# Altium PCB PCB_arduino_uno_cong_v2.PcbDoc
Units mm, origin at the board's own origin, x right, y up, seen from the top; angles counter-clockwise.
Board outline 82.8 x 51.56 mm, 2 copper layers (Top Layer, Bottom Layer); 55 components, 55 nets, 241 pads, 61 vias.
Unrouted connection lines stored in the file: 1.
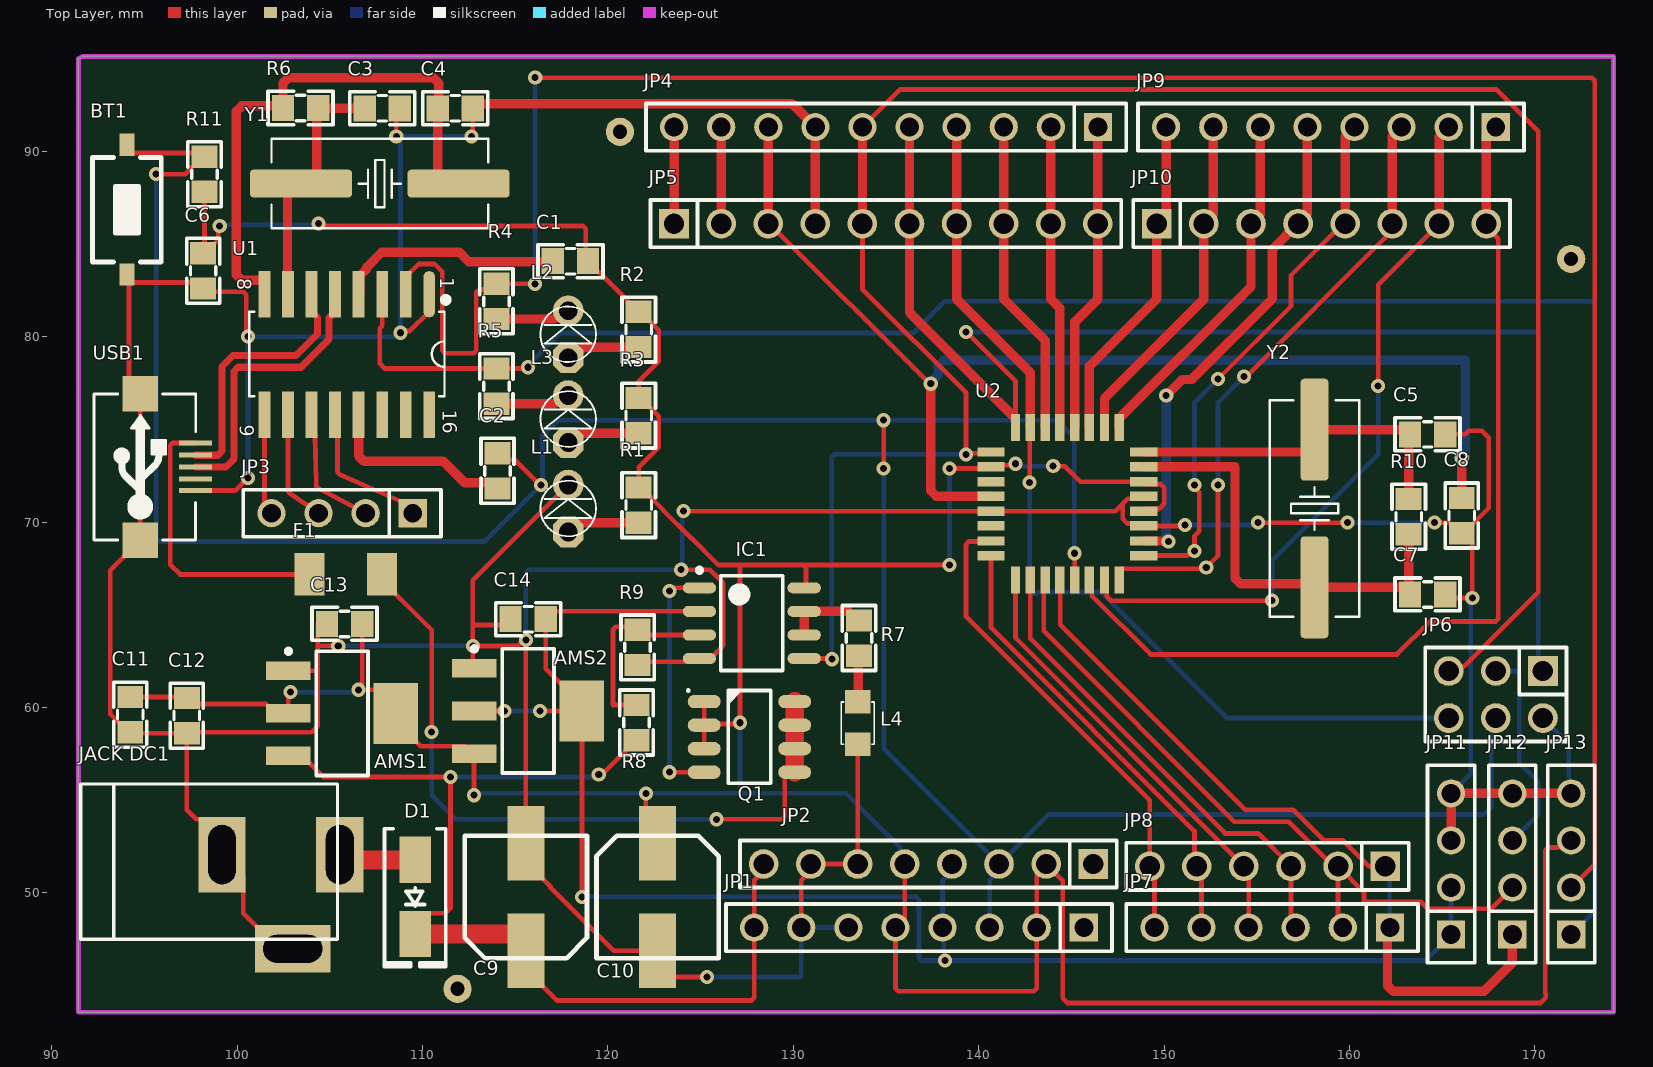
[diagram p0: Top Layer view]
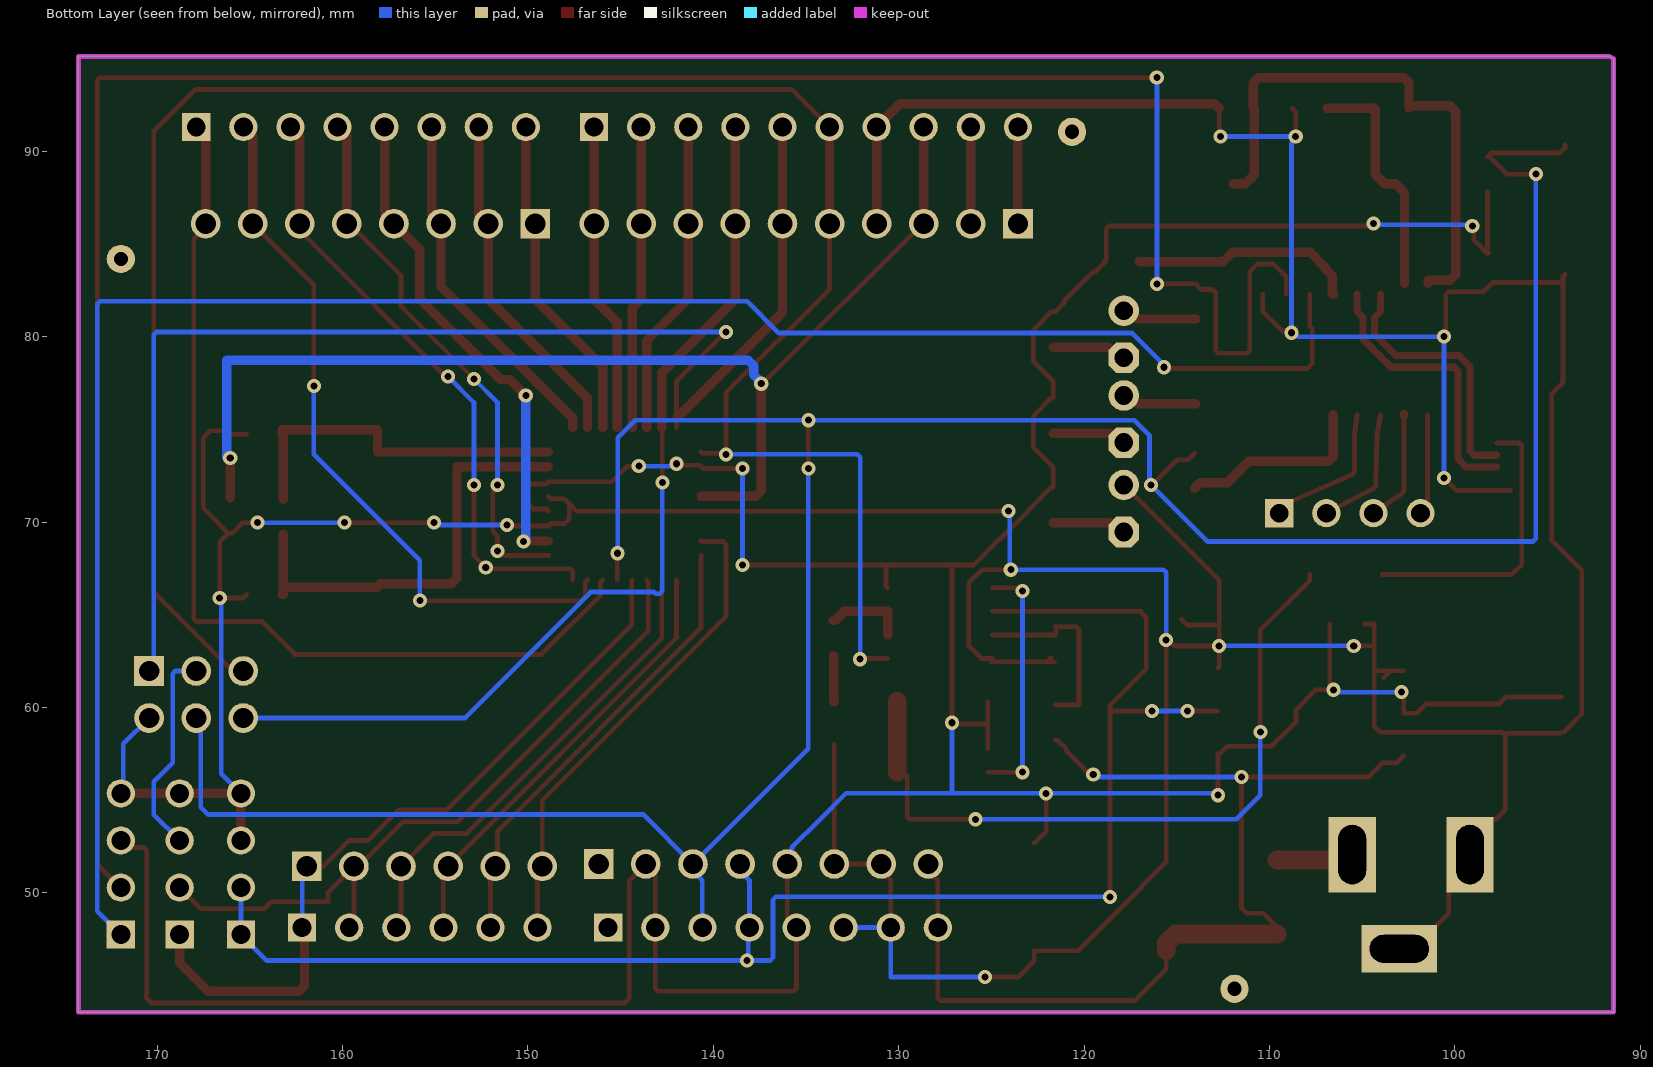
[diagram p1: Bottom Layer view, seen from below]
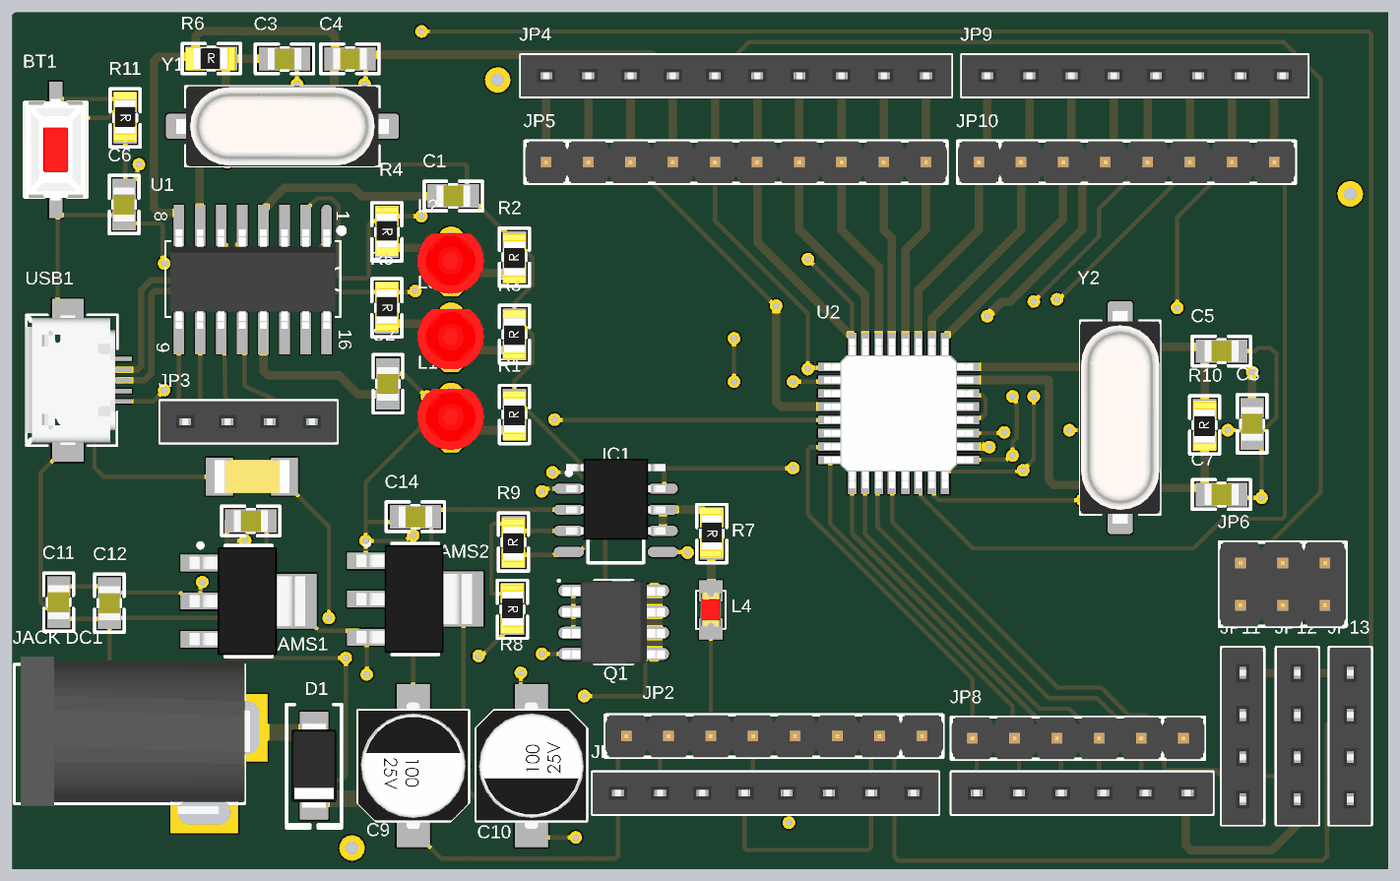
[diagram p2: 3D render of the assembled board from above, using the file's embedded part models]

## Layer stack, top to bottom
Top Solder: solder mask 0.0102, Solder Resist, Dk 3.5
Top Layer: signal copper 0.0356
Dielectric 1: dielectric 0.32, FR-4, Dk 4.8
Bottom Layer: signal copper 0.0356
Bottom Solder: solder mask 0.0102, Solder Resist, Dk 3.5

## Board outline
91.44,43.561 174.244,43.561 174.244,95.123 91.648,95.123 91.44,95.009

## Design rules (kind name [scope] priority, off if disabled: settings)
Clearance [All] p1: gap=0.254 ignorepadtopadclearanceinfootprint=FALSE except(0: Arc-Hole Track-Hole SMDPad-Hole THPad-Hole Via-Hole Fill-Hole Poly-Hole Region-Hole Text-Hole)
DiffPairsRouting [All] p1: maxlimit=0.254 minlimit=0.254 mostfreqgap=0.254 toplayer_minwidth=0.381 toplayer_maxwidth=0.381 toplayer_prefwidth=0.381 bottomlayer_minwidth=0.381 bottomlayer_maxwidth=0.381 bottomlayer_prefwidth=0.381 maxuncoupledlength=12.7
PolygonConnect [All] p1: connectstyle=Relief reliefconductorwidth=0.254 reliefentries=4 polygonreliefangle="90 Angle" airgapwidth=0.254
RoutingVias [All] p1: holewidth=0.381 width=0.762 viastyle="Through Hole" minholewidth=0.254 minwidth=0.508 maxholewidth=0.711 maxwidth=1.27
SolderMaskExpansion [All] p1: expansion=0.102 istentingtop=FALSE
Width [All] p1: maxlimit=1.016 minlimit=0.254 preferedwidth=0.508
29 further rules are at their usual default settings.

## Classes and differential pairs
differential pair USB: +USB_P -USB_N

## Components (designator, comment, footprint, x,y, rotation, side; value= is the part's Value field where it differs from the comment)
AMS1 "AMS1117-3.3V" SOT223 105.664,59.69 r270 top value="AMS1117-3.3V SOT223"
AMS2 "AMS1117-3.3V" SOT223 115.697,59.817 r270 top value="AMS1117-3.3V SOT223"
BT1 "Nut Nhan 2 Chan SMD 3x6x2.5" "Nut Nhan 2 Chan SMD 3x6x2.5" 94.056,86.857 r90 top
C1 "104" "tu 0805" 117.983,84.074 r180 top
C2 "104" "tu 0805" 114.046,72.771 r270 top
C3 "22pF" "tu 0805" 107.823,92.329 r0 top
C4 "22pF" "tu 0805" 111.76,92.329 r0 top
C5 "104" "tu 0805" 164.212,74.741 r0 top
C6 "104" "tu 0805" 98.171,83.566 r270 top
C7 "104" "tu 0805" 164.212,66.105 r0 top
C8 "104" "tu 0805" 166.059,70.363 r270 top
C9 "47uF" "tu nhom 6.3 (d)" 115.57,49.784 r90 top
C10 "47uF" "tu nhom 6.3 (d)" 122.682,49.784 r270 top
C11 "104" "tu 0805" 94.231,59.62 r90 top
C12 "104" "tu 0805" 97.282,59.563 r90 top
C13 "104" "tu 0805" 105.791,64.516 r0 top
C14 "104" "tu 0805" 115.697,64.77 r0 top
D1 "M7" "DIODE SMA" 109.601,49.784 r270 top
F1 "0.5A 125V" "Cau Chi SMD1808" 105.867,67.183 r0 top
IC1 "LM358 SOP8" "SOP 8" 127.762,64.554 r0 top
"JACK DC1" "JACK DC 5.5" "JACK DC 5.5" 102.362,49.53 r0 top value="Jac DC"
JP1 "JP 1x8 2.54" "JP 1x8 CT" 145.669,48.133 r180 top
JP2 "JP 1x8 2.54" "JP 1x8 DT" 146.177,51.562 r180 top
JP3 "JP 1x4 2.54" "JP 1x4 CT" 109.474,70.485 r180 top
JP4 "JP 1x10 2.54" "JP 1x10 CT" 146.431,91.313 r180 top
JP5 "JP 1x10 2.54" "JP 1x10 DT" 123.567,86.106 r0 top
JP6 "JP 2x3 2.54" "JP 2x3 DT" 167.894,60.706 r180 top
JP7 "JP 1x6 2.54" "JP 1x6 CT" 162.179,48.133 r180 top
JP8 "JP 1x6 2.54" "JP 1x6 DT" 161.925,51.435 r180 top
JP9 "JP 1x8 2.54" "JP 1x8 CT" 167.89,91.313 r180 top
JP10 "JP 1x8 2.54" "JP 1x8 DT" 149.606,86.106 r0 top
JP11 "JP 1x4 2.54" "JP 1x4 CT" 165.481,47.752 r90 top
JP12 "JP 1x4 2.54" "JP 1x4 CT" 168.783,47.752 r90 top
JP13 "JP 1x4 2.54" "JP 1x4 CT" 171.958,47.752 r90 top
L1 "LED 3mm" LED-3MM-RED 117.856,69.469 r90 top
L2 "LED 3mm" LED-3MM-RED 117.856,78.867 r90 top
L3 "LED 3mm" LED-3MM-RED 117.856,74.295 r90 top
L4 "LED 0805" LED-0805-Red 133.477,60.308 r270 top
Q1 "MOSFET_P" SO-8 127.635,58.42 r0 top
R1 "1k" "tro smd 0805" 121.6,70.923 r90 top
R2 "1k" "tro smd 0805" 121.6,80.391 r90 top
R3 "1k" "tro smd 0805" 121.6,75.749 r90 top
R4 "1k" "tro smd 0805" 114.046,81.915 r270 top
R5 "1k" "tro smd 0805" 114.046,77.343 r270 top
R6 "1M" "tro smd 0805" 103.42,92.405 r0 top
R7 "1k" "tro smd 0805" 133.602,63.754 r270 top
R8 "10k" "tro smd 0805" 121.6,59.195 r270 top
R9 "10k" "tro smd 0805" 121.539,63.246 r90 top
R10 "10k" "tro smd 0805" 163.134,70.293 r90 top
R11 "10k" "tro smd 0805" 98.298,88.773 r270 top
U1 "CH340C" SOIC16_50_284_25X90_SMT 105.943,79.046 r270 top
U2 "ATMEGA168-20AU" ATMEGA168 144.78,70.993 r180 top
USB1 "USB Micro 5p SMD" "USB Micro 5p SMD" 97.747,72.976 r90 top
Y1 "16Mhz" "Thach Anh 2 chan SMD" 107.696,88.265 r180 top value=4Mhz
Y2 "16Mhz" "Thach Anh 2 chan SMD" 158.115,70.739 r90 top value=4Mhz

## Footprints (in the part's own frame and the unit in brackets; to place one, negate y for a bottom-side part, rotate by r counter-clockwise, add the part's x,y. Pads: shape width x height; smd on the part's side, far side on the other; paste and mask are expansions set on the pad)
ATMEGA168 [mil]
  rect 58x20 smd: 1(-162,110) 2(-162,79) 3(-162,47) 4(-162,16) 5(-162,-16) 6(-162,-47) 7(-162,-79) 8(-162,-110) 17(162,-110) 18(162,-79) 19(162,-47) 20(162,-16) 21(162,16) 22(162,47) 23(162,79) 24(162,110)
  rect 20x58 smd: 9(-110,-162) 10(-79,-162) 11(-47,-162) 12(-16,-162) 13(16,-162) 14(47,-162) 15(79,-162) 16(110,-162) 25(110,162) 26(79,162) 27(47,162) 28(16,162) 29(-16,162) 30(-47,162) 31(-79,162) 32(-110,162)
  body extent -177,-177 177,177, height 47
"Cau Chi SMD1808" [mil]
  rect 64x90 smd: 1(-77,0) 2(77,0)
  body extent -91,-39 91,39, height 39
"DIODE SMA" [mm] "SMA"
  rect 2.5x1.7 smd: 1(-2,0) 2(2,0)
  silkscreen extent -3.68,-1.65 3.75,1.65, body extent -2.6,-1.37 2.6,1.37, height 2.4
"JACK DC 5.5" [mm] "Jac DC input"
  rect 2.54x4.064 hole 1.5 slot 3.2 at 90 deg: 1(3.175,2.54) 2(-3.175,2.54)
  rect 4.064x2.54 hole 1.5 slot 3.2 at 0 deg: 3(0.635,-2.54)
  silkscreen extent -10.79,-2.03 3.05,6.35, body extent -10.42,-2.67 3.4,6.84, height 11.02
"JP 1x4 CT" [mm]
  rect 1.52x1.52 hole 1.02: 1(0,0)
  round 1.52 hole 1.02: 2(2.54,0) 3(5.08,0) 4(7.62,0)
  silkscreen extent -1.52,-1.27 9.14,1.27, body extent -1.52,-1.25 9.14,1.25, height 8.51
"JP 1x6 CT" [mm] "6 row, straight, gold plating"
  rect 1.52x1.52 hole 1.02: 1(0,0)
  round 1.52 hole 1.02: 2(2.54,0) 3(5.08,0) 4(7.62,0) 5(10.16,0) 6(12.7,0)
  silkscreen extent -1.52,-1.27 14.22,1.27, body extent -1.52,-1.25 14.22,1.25, height 8.51
"JP 1x6 DT" [mm] "6 pins, 1 row, straight, gold plating"
  rect 1.6x1.6 hole 1.1: 1(0,0)
  round 1.6 hole 1.1: 2(2.54,0) 3(5.08,0) 4(7.62,0) 5(10.16,0) 6(12.7,0)
  silkscreen extent -1.27,-1.27 13.97,1.27, body extent -1.27,-1.27 13.97,1.27, height 8.54
"JP 1x8 CT" [mm] "8 row, straight, gold plating"
  rect 1.52x1.52 hole 1.02: 1(0,0)
  round 1.52 hole 1.02: 2(2.54,0) 3(5.08,0) 4(7.62,0) 5(10.16,0) 6(12.7,0) 7(15.24,0) 8(17.78,0)
  silkscreen extent -1.52,-1.27 19.3,1.27, body extent -1.52,-1.25 19.3,1.25, height 8.51
"JP 1x8 DT" [mm] "8 pins, 1 row, straight, gold plating"
  rect 1.6x1.6 hole 1.1: 1(0,0)
  round 1.6 hole 1.1: 2(2.54,0) 3(5.08,0) 4(7.62,0) 5(10.16,0) 6(12.7,0) 7(15.24,0) 8(17.78,0)
  silkscreen extent -1.27,-1.27 19.05,1.27, body extent -1.27,-1.27 19.05,1.27, height 8.54
"JP 1x10 CT" [mm] "10 row, straight, gold plating"
  rect 1.52x1.52 hole 1.02: 1(0,0)
  round 1.52 hole 1.02: 2(2.54,0) 3(5.08,0) 4(7.62,0) 5(10.16,0) 6(12.7,0) 7(15.24,0) 8(17.78,0) 9(20.32,0) 10(22.86,0)
  silkscreen extent -1.52,-1.27 24.38,1.27, body extent -1.52,-1.25 24.38,1.25, height 8.51
"JP 1x10 DT" [mm] "10 pins, 1 row, straight, gold plating"
  rect 1.6x1.6 hole 1.1: 1(0,0)
  round 1.6 hole 1.1: 2(2.54,0) 3(5.08,0) 4(7.62,0) 5(10.16,0) 6(12.7,0) 7(15.24,0) 8(17.78,0) 9(20.32,0) 10(22.86,0)
  silkscreen extent -1.27,-1.27 24.13,1.27, body extent -1.27,-1.27 24.13,1.27, height 8.54
"JP 2x3 DT" [mm]
  rect 1.6x1.6 hole 1.1: 1(-2.54,-1.27)
  round 1.6 hole 1.1: 2(0,-1.27) 3(2.54,-1.27) 4(2.54,1.27) 5(0,1.27) 6(-2.54,1.27)
  silkscreen extent -3.81,-2.54 3.81,2.54, body extent -3.81,-2.54 3.81,2.54, height 8.55
LED-3MM-RED [mil]
  oct 65x65 hole 40: 1(0,0)
  round 65 hole 40: 2(100,0)
  silkscreen extent -9,-59 109,59, body extent -27,-77 117,80, height 181
LED-0805-Red [mil]
  rect 50x55 smd: 1(0,0) 2(90,0)
  silkscreen extent 0,-35 90,35, body extent 5,-25 85,25, height 43
"Nut Nhan 2 Chan SMD 3x6x2.5" [mm] "Switch SMD type"
  rect 1.2x0.8 smd: 1(-3.5,0) 2(3.5,0)
  silkscreen extent -2.82,-1.85 2.82,1.85, body extent -3.05,-1.85 3.05,1.85, height 2.5
SO-8 [mm] "SOIC, 8-Leads, Body 4.90x3.90mm, Pitch 1.27mm, IPC Medium Density"
  oval 1.78x0.72 smd: 1(-2.44,1.905) 2(-2.44,0.635) 3(-2.44,-0.635) 4(-2.44,-1.905) 5(2.44,-1.905) 6(2.44,-0.635) 7(2.44,0.635) 8(2.44,1.905)
  silkscreen extent -3.3,-2.5 1.14,2.5, body extent -3.1,-2.5 3.1,2.5, height 1.75
SOIC16_50_284_25X90_SMT [mm]
  oval 2.5x0.635 smd mask+0.076: 1(-3.25,4.42)
  rect 2.5x0.635 smd mask+0.076: 2(-3.25,3.15) 3(-3.25,1.88) 4(-3.25,0.61) 5(-3.25,-0.66) 6(-3.25,-1.93) 7(-3.25,-3.2) 8(-3.25,-4.47) 9(3.25,-4.47) 10(3.25,-3.2) 11(3.25,-1.93) 12(3.25,-0.66) 13(3.25,0.61) 14(3.25,1.88) 15(3.25,3.15) 16(3.25,4.42)
  silkscreen extent -3.07,-5.3 2.26,5.44, body extent -3.02,-4.97 2.98,4.93, height 1.4
"SOP 8" [mm] "SOIC, 8-Leads, Body 4.9x3.9mm, Pitch 1.27mm, IPC High Density"
  oval 1.8x0.6 smd: 1(-2.825,1.905) 2(-2.825,0.635) 3(-2.825,-0.635) 4(-2.825,-1.905) 5(2.825,-1.905) 6(2.825,-0.635) 7(2.825,0.635) 8(2.825,1.905)
  silkscreen extent -2.95,-2.55 1.68,2.98, body extent -2.99,-1.18 3,3.72, height 1.8
SOT223 [mm]
  rect 1x2.4 smd: 1(-2.3,-2.9) 2(0,-2.9) 3(2.3,-2.9)
  rect 3.3x2.4 smd: 4(0,2.9)
  silkscreen extent -3.47,-3.02 3.35,1.4, body extent -3.25,-3.56 3.25,3.4, height 1.68
"Thach Anh 2 chan SMD" [mm] "SMD Crystal HC49/US-SM package"
  round 0.508 on Mech15: 0(0,0)
  rrect25% 5.5x1.5 smd: 1(-4.25,0) 2(4.25,0)
  silkscreen extent -5.84,-2.41 5.84,2.41, body extent -6.4,-2.41 6.4,2.42, height 4.29
"tro smd 0805" [mm]
  rect 1.2x1.4 smd: 1(-0.946,-0.061) 2(0.954,-0.061)
  silkscreen extent -1.75,-0.97 1.75,0.84, body extent -1.56,-0.76 1.44,0.64, height 0.53
"tu 0805" [mm] "Compoment SMD 80x50mil"
  rect 1.2x1.4 smd: 1(-0.946,-0.003) 2(0.954,-0.003)
  silkscreen extent -1.75,-0.89 1.75,0.89, body extent -1.01,-0.64 1.01,0.63, height 0.61
"tu nhom 6.3 (d)" [mm]
  rect 4x2 smd: 1(-2.9,0) 2(2.9,0)
  silkscreen extent -3.3,-3.3 3.3,3.3, body extent -3.8,-3.3 3.8,3.3, height 8
"USB Micro 5p SMD" [mil]
  rect 10x70 smd: 1(51.18,0) 2(25.59,0) 3(0,0) 4(-25.59,0) 5(-50,0)
  rect 74.8x74.8 smd: 5(-155.51,116.84) 5(155.51,116.84)
  silkscreen extent -155,-1 155,215, body extent -157,5 158,218, height 107

## Part data
AMS1 AMS2: library part "AMS1117 SMD", "Dán", Chung_Loai=Dán, Don_Vi=Con, Ma_Hang=MH000596
C1 C2 C5 C6 C7 C8 C11 C12 C13 C14: library part "Tu 0805 104 50V 10%", "Dán", Chung_Loai=Dán, Don_Vi=Con, Ma_Hang=MH004551, So_Chan=2, Ten_Linh_Kien="Tụ 0805 104-100nF 10% 50V"
C3 C4: library part "Tu 0805 22pF 50V 10%", "Dán", Chung_Loai=Dán, Don_Vi=Con, Ma_Hang=MH004560, So_Chan=2, Ten_Linh_Kien="Tụ 0805 22P 10% 50V"
C9 C10: library part "Tu Nhom 47uF 25V", "Dán", Chung_Loai=Dán, Don_Vi=Con, Ma_Hang=MH002216, So_Chan=2, Ten_Linh_Kien="Tụ Nhôm 47uF 25V 6.3x5.5MM"
D1: library part "Diode M7 ( 4007 )", "Dán", Chung_Loai=Dán, Don_Vi=Con, Ma_Hang=MH000944, Ten_Linh_Kien="Diode M7 1N4007 SMD 1A 1000V"
F1: library part "Cau chi 0.5A 125V SMD1808", "Cau chi 0.5A 125V SMD1808", Ma_Hang=MH009241, Ten="Cầu Chì 0.5A 125V SMD1808 0451.500MRL"
IC1: "Dán", Chung_Loai=Dán, Don_Vi=Con, Ma_Hang=MH000609, Ten_Linh_Kien="LM358 SOP8"
JP1 JP9: library part "JP 1x8 2.54 Cai Thang", "Cắm", Chung_Loai=Cắm, Don_Vi=Con, Ma_Hang=MH004006, Ten_Linh_Kien="Jump Đơn Cái 2.54MM 1x20P Thẳng"
JP2 JP10: library part "JP 1x8 2.54 Duc Thang", "Cắm", Chung_Loai=Cắm, Don_Vi=Con, Ma_Hang=MH000903, Ten_Linh_Kien="Jump Đơn Đực 2.54MM 1x40P Thẳng 11MM"
JP3 JP11 JP12 JP13: library part "JP 1x4 2.54 Cai Thang", "Cắm", Chung_Loai=Cắm, Don_Vi=Con, Ma_Hang=MH004006, Ten_Linh_Kien="Jump Đơn Cái 2.54MM 1x20P Thẳng"
JP4: library part "JP 1x10 2.54 Cai Thang", "Cắm", Chung_Loai=Cắm, Don_Vi=Con, Ma_Hang=MH004006, Ten_Linh_Kien="Jump Đơn Cái 2.54MM 1x20P Thẳng"
JP5: library part "JP 1x10 2.54 Duc Thang", "Cắm", Chung_Loai=Cắm, Don_Vi=Con, Ma_Hang=MH000903, Ten_Linh_Kien="Jump Đơn Đực 2.54MM 1x40P Thẳng 11MM"
JP6: library part "JP 2x3 2.54 Duc Thang", "Cắm", Chung_Loai=Cắm, Don_Vi=Con, Ma_Hang=MH002686, Ten_Linh_Kien="Jump Đôi Đực 2.54MM 2x40P Thẳng 11MM"
JP7: library part "JP 1x6 2.54 Cai Thang", "Cắm", Chung_Loai=Cắm, Don_Vi=Con, Ma_Hang=MH004006, Ten_Linh_Kien="Jump Đơn Cái 2.54MM 1x20P Thẳng"
JP8: library part "JP 1x6 2.54 Duc Thang", "Cắm", Chung_Loai=Cắm, Don_Vi=Con, Ma_Hang=MH000903, Ten_Linh_Kien="Jump Đơn Đực 2.54MM 1x40P Thẳng 11MM"
L1 L2 L3: library part "LED 3mm Do", "Cắm", Chung_Loai=Cắm, Don_Vi=Con, Ma_Hang=MH003892, Ten_Linh_Kien="Led 3MM Phủ Đỏ (10c)"
L4: library part "LED 0805 Do", "Dán", Chung_Loai=Dán, Don_Vi=Con, Ma_Hang=MH000897, Ten_Linh_Kien="LED 0805 Màu Đỏ (Red)"
Q1: library part Q000008, "MOSFET P-CH 30V 5.8A 8-SOIC", Current - Continuous Drain (Id) @ 25°C="5.8A (Ta)", Drain to Source Voltage (Vdss)=30V, Input Capacitance (Ciss) @ Vds="1100pF @ 25V", Manufacturer="Infineon Technologies Americas Corp.", Manufacturer Part Number=IRF7406TRPBF, Operating Temperature="-55°C ~ 150°C (TJ)", Power - Max=2.5W, Supplier Part Number 1=IRF7406PBFCT-ND, FET Feature=Standard, FET Type="MOSFET P-Channel, Metal Oxide", Gate Charge (Qg) @ Vgs="59nC @ 10V", HelpURL=http://www.irf.com/product-info/datasheets/data/irf7406pbf.pdf, Part Number=Q000008, Rds On (Max) @ Id, Vgs="45 mOhm @ 2.8A, 10V", Supplier 1=Digi-Key, Vgs(th) (Max) @ Id="1V @ 250µA"
R1 R2 R3 R4 R5: library part "Tro 0805 1% 1k", "Dán", Chung_Loai=Dán, Don_Vi=Con, Ma_Hang=MH005468, So_Chan=2, Ten_Linh_Kien="Trở 0805 1% 1k"
R6: library part "Tro 0805 5% 1M", "Dán", Chung_Loai=Dán, Don_Vi=Con, Ma_Hang=MH005235, So_Chan=2, Ten_Linh_Kien="Trở 0805 5% 1M"
R7: library part "Tro 0805 5% 1k", "Dán", Chung_Loai=Dán, Don_Vi=Con, Ma_Hang=MH005234, So_Chan=2, Ten_Linh_Kien="Trở 0805 5% 1k"
R8 R9 R10: library part "Tro 0805 1% 10k", "Dán", Chung_Loai=Dán, Don_Vi=Con, Ma_Hang=MH005473, So_Chan=2, Ten_Linh_Kien="Trở 0805 1% 10k"
R11: library part "Tro 0805 5% 10k", "Dán", Chung_Loai=Dán, Don_Vi=Con, Ma_Hang=MH005239, So_Chan=2, Ten_Linh_Kien="Trở 0805 5% 10k"
U1: "USB Bridge, USB to UART USB 2.0 UART Interface", Alternate Part Number-1=NA, Case/Package=SOIC16, Manufacturer=Olimex, Supplier Part Number-1=C84681, Manufacturer Part Number=CH340C, Supplier-1=LCSC
U2: "AVR AVRÂ® ATmega Microcontroller IC 8-Bit 20MHz 16KB _8K x 16_ FLASH 32-TQFP _7x7_", Package="TQFP-32 Microchip", Availability=Unavailable, MF=Microchip, MP=ATMEGA168-20AU, Price=None, SnapEDA_Link=https://www.snapeda.com/parts/ATMEGA168-20AU/Microchip/view-part/776709/?ref=snap
USB1: "USB Type B", Ma_Hang=MH001020, Ten="MicroUSB MK5P SMD"
Y1 Y2: library part "Thach Anh 2 chan SMD", "Crystal For all Crystal 2pin."
BT1: Ma_Hang=MH001036, Ten="Nút Nhấn 2 Chân 3x6x2.5MM SMD"

## Free pads (board coordinates)
  round 1.524 hole 0.762: 1(120.65,91.059) 3(111.887,44.831) 3(171.958,84.201)

## Via types
v1: diameter 0.762, hole 0.381, Top Layer to Bottom Layer, 61 vias

## Nets (pads, with @x,y where several pads share a name; then routed paths per layer and width w, separated by ;. In a path a pad name is that pad's centre, name@x,y a point inside that pad or via, vN(x,y) a via of type N, cw(c..) or ccw(c..) an arc to the next point about the centre after c; other vN are vias at no path point)
3.3V: AMS2.2 AMS2.4 C14.2 IC1.2 JP1.4 JP2.4 JP11.1 JP11.2 | length 88.8
  Top Layer w0.254: AMS2.2 v1(114.427,59.817) ; v1(116.337,59.817) AMS2.4 v1(118.597,49.792) ; AMS2.4@118.597,59.915 118.597,60.14 116.651,62.086 116.651,64.867 116.974,65.189 IC1.2 ; JP1.4 JP1.4@138.112,48.069 ; v1@138.112,46.419 v1(138.176,46.355)
  Bottom Layer w0.254: v1@114.554,59.817 v1(116.337,59.817) ; v1(118.597,49.792) 136.622,49.792 136.779,49.635 136.779,46.504 136.928,46.355 v1(138.176,46.355) ; JP2.4 138.557,51.198 138.049,50.69 JP1.4 138.112,48.069 138.112,46.419 v1(138.176,46.355) ; JP11.2 JP11.1 164.084,46.355 v1(138.176,46.355)
5V: JP6.2 JP12.3 U1.16 | length 11.5
  Top Layer w0.254: JP6.2@167.894,61.849 JP6.2
  Bottom Layer w0.254: JP6.2 169.015,61.976 169.164,61.827 169.164,57.023 170.18,56.007 170.18,54.229 JP12.3
+5: AMS1.2 AMS1.4 AMS2.3 C1.1 C6.1 C10.1 C11.2 C12.2 C13.2 IC1.8 JP1.2 JP1.5 JP2.2 JP2.5 JP13.3 Q1.1 Q1.2 Q1.3 R1.2 R2.2 R3.2 R11.2 U2.4 U2.6 U2.18 | length 219.6
  Top Layer w0.254: C11.2 97.229,60.574 97.605,60.198 101.556,60.198 102.064,59.69 AMS1.2 102.764,60.727 v1(102.87,60.833) ; R11.2 98.237,84.581 C6.1 98.268,84.512 98.741,84.985 98.977,85.221 98.977,85.896 v1(99.06,85.979) ; v1(104.394,86.106) 104.531,86.106 104.658,85.979 118.653,85.979 118.802,85.83 118.802,84.077 C1.1@118.829,84.077 ; C13.2 106.745,61.29 106.553,61.097 v1(106.553,60.96) 107.491,60.96 108.564,59.887 108.564,59.24 109.892,57.912 112.275,57.912 AMS2.3@112.797,57.39 ; v1(112.776,55.274) 112.776,57.271 112.797,57.292 AMS2.3 ; C1.1 118.929,83.977 119.402,83.504 119.502,83.504 121.088,81.918 121.088,81.818 121.561,81.345 121.761,81.345 122.742,80.364 122.742,78.688 121.661,77.607 R3.2 121.761,76.703 122.742,75.722 122.742,74.045 121.661,72.964 R1.2 121.761,71.877 122.998,70.639 122.998,70.615 124.46,69.153 124.485,69.153 125.947,67.691 127.127,67.691 ; v1(122.047,55.372) 122.047,53.319 C10.1 ; Q1.3 Q1.2 ; Q1.1 Q1.2 ; IC1.8 130.683,66.555 130.683,67.542 130.534,67.691 ; JP2.5 136.017,48.641 JP1.5 135.509,44.853 135.658,44.704 142.98,44.704 143.129,44.853 JP1.2 143.129,51.054 JP2.2 144.528,50.671 144.528,44.321 144.78,44.069 170.307,44.069 170.583,44.345 170.583,44.555 170.561,44.577 170.561,52.302 170.71,52.451 171.234,52.451 171.615,52.832 JP13.3 ; v1(138.43,67.691) 130.534,67.691 ; v1(138.43,72.898) 140.564,72.898 U2.18 140.741,73.076 141.91,73.076 v1(141.986,73.152) ; v1(144.018,73.025) 144.653,73.025 145.491,72.187 U2.6 149.022,72.06 149.813,72.06 150.012,71.86 150.012,70.988 149.738,70.714 149.022,70.714 U2.4 ; Q1.2 125.258,59.118 127.063,59.118 v1(127.127,59.182) 127.127,67.691 ; 127.127,67.691 130.534,67.691
  Bottom Layer w0.254: v1(99.06,85.979) 99.123,86.042 104.331,86.042 v1(104.394,86.106) ; v1(102.87,60.833) 106.426,60.833 v1(106.553,60.96) ; v1@112.776,55.372 v1(122.047,55.372) 127.127,55.372 ; v1(127.127,59.182) 127.127,55.372 ; JP2.5 135.759,51.82 135.759,52.455 134.239,53.975 132.842,55.372 127.127,55.372 ; v1(138.43,67.691) v1(138.43,72.898) ; v1(141.986,73.152) 142.113,73.025 v1(144.018,73.025)
A0: JP7.6 JP8.6 U2.23 | length 26.3
  Top Layer w0.254: U2.23 140.64,68.961 139.468,68.961 139.319,68.812 139.319,64.897 149.225,54.991 JP8.6 149.479,51.181 JP7.6
A1: JP7.5 JP8.5 U2.24 | length 24.8
  Top Layer w0.254: U2.24 140.665,64.313 151.638,53.34 151.638,51.562 JP8.5 152.019,51.181 JP7.5
A2: JP7.4 JP8.4 U2.25 | length 24
  Top Layer w0.254: U2.25 141.986,63.754 JP8.4 154.559,51.181 JP7.4
A3: JP7.3 JP8.3 U2.26 | length 25.7
  Top Layer w0.254: U2.26 142.773,63.729 153.289,53.213 155.067,53.213 JP8.3 156.845,48.387 JP7.3
A4: JP7.2 JP8.2 JP12.2 U2.27 | length 38.8
  Top Layer w0.254: U2.27 143.51,66.802 143.51,64.135 153.797,53.848 156.718,53.848 158.877,51.689 159.512,51.689 159.512,51.562 JP8.2 ; JP7.2 159.385,48.387 JP8.2 ; JP12.2 167.642,49.151 164.23,49.151 163.851,49.53 160.782,49.53 160.782,50.038 JP8.2
A5: JP7.1 JP8.1 JP12.1 U2.28 | length 41.3
  Top Layer w0.254: U2.28 144.399,66.853 144.399,64.472 154.41,54.461 154.432,54.483 156.972,54.483 158.623,52.832 159.639,52.832 160.084,52.387 cw(c159.385,51.435) 160.337,52.134 161.036,51.435 JP8.1 ; JP7.1@161.925,48.387 JP7.1
  Top Layer w0.508: JP7.1 162.052,48.006 162.052,45.002 162.35,44.704 167.257,44.704 168.783,46.23 JP12.1
  Bottom Layer w0.254: JP8.1 162.179,51.181 JP7.1
AREF: C8.1 JP4.8 JP5.3 U2.20 | length 64
  Top Layer w0.254: JP5.3 128.712,86.106 137.348,77.47 v1(137.414,77.47)
  Top Layer w0.508: JP5.3 128.651,86.11 JP4.8 ; v1(137.414,77.47) 137.414,71.697 137.712,71.399 U2.20 ; C8.1 v1(166.055,73.472)
  Bottom Layer w0.508: v1(137.414,77.47) 137.414,77.539 137.822,77.947 137.822,78.442 138.12,78.74 166.243,78.74 166.243,73.472 v1(166.055,73.472)
CH340_XT1: C3.1 R6.2 U1.7 Y1.2 | length 13
  Top Layer w0.508: U1.7@102.718,82.879 102.718,87.769 103.214,88.265 103.794,88.265 104.29,88.761 104.29,92.26 R6.2 104.384,92.335 106.868,92.335 C3.1
CH340_XT2: C4.1 R6.1 U1.8 Y1.1 | length 29.5
  Top Layer w0.508: U1.8@101.448,82.879 101.448,83.019 101.41,83.058 100.247,83.058 99.949,83.356 99.949,92.158 100.247,92.456 102.363,92.456 R6.1 102.474,93.682 102.772,93.98 110.573,93.98 110.871,93.682 110.871,92.382 C4.1 110.814,88.761 111.31,88.265 Y1.1
GND: "JACK DC1.2" "JACK DC1.3" AMS1.1 AMS2.1 BT1.1 C3.2 C4.2 C5.2 C6.2 C7.2 C8.2 C9.2 C10.2 C11.1 C12.1 C13.1 C14.1 IC1.4 JP1.6 JP1.7 JP2.6 JP2.7 JP4.7 JP5.4 JP6.6 JP11.3 JP11.4 JP12.4 JP13.4 L1.2 L4.2 R9.1 U1.1 U2.3 U2.5 U2.21 USB1.5 | length 315.6
  Top Layer w0.254: BT1.1 BT1.1@94.164,83.25 ; USB1.5@96.985,71.706 99.9,71.706 v1(100.584,72.39) ; C12.1@97.385,58.617 97.442,58.674 104.013,58.674 104.345,59.006 104.345,61.99 ; v1(100.584,80.01) 100.487,80.107 100.487,82.274 100.338,82.423 98.456,82.423 97.948,82.931 94.329,82.931 94.164,83.096 BT1.1@94.164,83.25 ; AMS1.1 AMS1.1@103.464,61.99 ; 102.997,46.99 102.235,46.99 100.33,48.895 100.33,50.927 99.187,52.07 99.187,52.832 98.044,53.975 97.79,53.975 97.285,54.48 C12.1 94.291,58.617 C11.1 94.134,58.674 93.153,59.655 93.153,67.401 94.779,69.026 94.779,76.926 94.164,77.541 BT1.1@94.164,83.25 ; AMS1.1@103.837,61.617 AMS1.1@103.464,61.99 ; C13.1 104.345,64.513 104.345,63.329 ; v1(105.454,63.329) 104.345,63.329 ; v1(108.585,90.805) 108.585,92.133 C3.2 ; v1(108.817,80.221) 108.914,80.318 109.317,80.318 110.363,81.363 U1.1 ; v1(112.649,90.805) 112.714,90.87 C4.2 ; v1@112.714,63.255 112.714,62.2 AMS2.1 ; v1@112.714,63.417 112.714,64.455 ; v1@112.807,63.255 112.871,63.319 115.11,63.319 115.438,63.647 v1(115.575,63.647) 115.575,51.679 116.901,50.353 116.901,50.296 120.313,46.884 C10.2 122.682,46.339 123.555,45.466 v1(125.349,45.466) ; C14.1 114.44,64.455 112.714,64.455 ; L1.2 112.714,66.867 112.714,64.455 ; R9.1@121.6,62.465 IC1.4@124.998,62.465 ; R9.1@121.788,62.681 R9.1@121.985,62.484 ; v1(123.952,67.437) 125.482,67.437 125.779,67.14 125.819,67.14 126.218,66.741 126.218,63.33 125.537,62.649 IC1.4 ; v1(124.079,70.612) 124.104,70.587 U2.21 147.365,70.587 147.777,70.998 ; JP1.7 130.429,50.69 130.937,51.198 JP2.7 JP2.6 L4.2 ; U2.5 148.768,71.272 148.051,71.272 147.777,70.998 ; v1(151.13,69.85) 151.079,69.799 U2.3 148.768,69.926 148.026,69.926 147.777,70.175 147.777,70.998 ; v1(155.067,69.977) v1(159.893,69.977) ; v1(164.592,69.977) 165.387,69.977 165.955,69.409 C8.2 C8.2@166.151,69.409 ; C7.2 165.355,65.913 v1(166.624,65.913) 166.624,68.936 C8.2@166.151,69.409 ; C5.2 166.243,74.738 166.435,74.93 167.132,74.93 167.513,74.549 167.513,70.766 166.155,69.409 C8.2@166.151,69.409 ; AMS1.1@103.464,61.99 104.345,61.99 ; 104.345,61.99 104.345,63.329
  Top Layer w0.508: C4.2 112.97,92.581 129.923,92.581 JP4.7 131.189,91.311 131.189,86.108 JP5.4 ; JP11.3 JP11.4 JP12.4 JP13.4
  Bottom Layer w0.254: v1(100.584,72.39) v1(100.584,80.01) 108.469,80.01 108.68,80.221 v1(108.817,80.221) 108.817,90.435 108.585,90.668 v1(108.585,90.805) v1(112.649,90.805) ; v1(105.454,63.329) v1@112.626,63.329 ; v1(115.575,63.647) 115.575,67.288 115.724,67.437 v1(123.952,67.437) 124.015,67.501 124.015,70.549 v1(124.079,70.612) ; v1(125.349,45.466) 130.429,45.466 JP1.7 JP1.6 ; v1(151.13,69.85) 154.94,69.85 v1(155.067,69.977) ; v1(159.893,69.977) v1(164.592,69.977) ; JP11.4 166.535,56.426 166.535,65.824 v1(166.624,65.913) ; JP6.6 171.831,58.039 171.831,55.499 JP13.4
  other v1: 112.714,63.319
IO_0: JP9.1 JP10.8 U2.30 | length 51.9
  Top Layer w0.254: U2.30 146.101,66.751 146.101,66.035 149.27,62.865 162.56,62.865 164.338,64.643 167.872,64.643 168.021,64.792 168.021,85.284 167.386,85.919 JP10.8
  Top Layer w0.508: JP10.8 167.386,90.809 JP9.1
IO_1: JP9.2 JP10.7 U2.31 | length 39.4
  Top Layer w0.254: U2.31 146.914,66.751 146.914,66.009 147.162,65.761 155.804,65.761 v1(155.829,65.786) ; v1(161.544,77.343) 161.544,82.804 JP10.7
  Top Layer w0.508: JP10.7 164.846,90.809 JP9.2
  Bottom Layer w0.254: v1(155.829,65.786) 155.829,67.945 161.544,73.66 v1(161.544,77.343)
IO_2: JP9.3 JP10.6 U2.32 | length 33.5
  Top Layer w0.254: U2.32 147.574,67.361 147.701,67.488 152.197,67.488 v1(152.273,67.564) 152.273,67.566 152.908,68.201 v1(152.908,72.009) ; v1(154.305,77.851) 154.432,77.851 161.915,85.334 161.915,85.351 162.306,85.742 JP10.6
  Top Layer w0.508: JP10.6 162.306,90.809 JP9.3
  Bottom Layer w0.254: v1(152.908,72.009) 152.908,76.454 v1(154.305,77.851)
IO_3: JP9.4 JP10.5 U2.1 | length 29.6
  Top Layer w0.254: U2.1 151.257,68.199 151.511,68.453 v1(151.638,68.453) 151.638,69.251 151.892,69.505 151.892,71.618 151.638,71.872 v1(151.638,72.009) ; v1(152.908,77.724) 156.845,81.661 156.845,83.312 159.639,86.106 JP10.5
  Top Layer w0.508: JP10.5 159.766,90.809 JP9.4
  Bottom Layer w0.254: v1(151.638,72.009) 151.638,76.454 v1(152.908,77.724)
IO_4: JP9.5 JP10.4 U2.2 | length 27.2
  Top Layer w0.508: U2.2 150.216,68.986 v1(150.241,68.961) ; v1(150.114,76.835) 150.975,77.696 151.483,77.696 155.829,82.042 155.829,84.709 JP10.4 157.73,86.61 JP9.5
  Bottom Layer w0.508: v1(150.114,76.835) 150.114,69.157 150.241,69.03 v1(150.241,68.961)
IO_5: JP9.6 JP10.3 U2.9 | length 19.4
  Top Layer w0.508: U2.9 147.574,75.59 154.686,82.702 JP10.3 155.19,86.61 JP9.6
IO_6: JP9.7 JP10.2 U2.10 | length 18.6
  Top Layer w0.508: U2.10 146.787,76.683 152.146,82.042 JP10.2 152.65,86.61 JP9.7
IO_7: JP9.8 JP10.1 U2.11 | length 17.9
  Top Layer w0.508: U2.11 145.974,78.41 149.606,82.042 JP10.1 150.11,86.61 JP9.8
IO_8: JP4.1 JP5.10 U2.12 | length 16.7
  Top Layer w0.508: U2.12 145.186,80.802 146.427,82.042 JP5.10 146.427,91.309 JP4.1
IO_9: JP4.2 JP5.9 U2.13 | length 16.4
  Top Layer w0.508: JP4.2 143.887,91.309 JP5.9 143.887,82.042 144.374,81.555 U2.13
IO_10: JP4.3 JP5.8 U2.14 | length 17.1
  Top Layer w0.508: JP4.3 141.347,91.309 JP5.8 141.347,82.042 143.586,79.803 U2.14
IO_11: JP4.4 JP5.7 JP6.4 U2.15 | length 52.5
  Top Layer w0.254: v1(142.748,72.136) 142.761,72.149 142.761,75.095 U2.15 ; JP6.4@165.29,59.499 JP6.4
  Top Layer w0.508: JP4.4 138.807,91.309 JP5.7 138.807,82.042 142.773,78.075 U2.15
  Bottom Layer w0.254: v1(142.748,72.136) 142.748,66.294 142.897,66.145 143.107,66.145 143.192,66.23 146.621,66.23 153.416,59.436 JP6.4 JP6.4@165.227,59.563
IO_12: JP4.5 JP5.6 JP6.1 U2.16 | length 73.9
  Top Layer w0.254: v1(139.319,80.264) 141.986,77.597 141.986,75.59 U2.16 ; JP6.1@170.18,62.23 JP6.1
  Top Layer w0.508: JP4.5 136.267,91.309 JP5.6 136.267,81.31 U2.16@141.986,75.59
  Bottom Layer w0.254: v1(139.319,80.264) 170.031,80.264 170.18,80.115 170.18,62.23 JP6.1
IO_13: IC1.5 JP4.6 JP5.5 JP6.3 U2.17 | length 111.1
  Top Layer w0.254: IC1.5 131.915,62.649 131.953,62.611 v1(132.08,62.611) ; JP5.5 133.727,82.566 139.319,76.974 v1(139.319,73.66) 139.382,73.724 140.602,73.724 U2.17 ; JP4.6 135.763,93.345 167.917,93.345 170.18,91.082 170.18,66.232 166.181,62.234 165.612,62.234 JP6.3
  Top Layer w0.508: JP5.5 133.731,86.11 JP4.6
  Bottom Layer w0.254: v1(132.08,62.611) 132.08,73.511 132.229,73.66 v1(139.319,73.66) ; JP6.3@165.1,62.23 JP6.3
NetC1_2: C1.2 U1.4 | length 12.2
  Top Layer w0.508: U1.4 106.617,82.359 106.617,83.292 106.998,83.673 106.998,83.756 107.803,84.562 111.989,84.562 112.497,84.054 117.005,84.054 C1.2
NetC2_2: C2.2 U1.13 | length 10.4
  Top Layer w0.508: U1.13 106.553,73.577 106.851,73.279 111.125,73.279 112.268,72.136 113.723,72.136 C2.2
NetD1_1: "JACK DC1.1" D1.1 | length 4.2
  Top Layer w1.016: 105.537,52.07 105.823,51.784 D1.1
NetF1_1: F1.1 USB1.1 | length 15.6
  Top Layer w0.254: USB1.1 96.523,74.276 96.393,74.146 96.393,67.713 96.923,67.183 F1.1
NetIC1_1: IC1.1 Q1.4 | length 13.3
  Top Layer w0.254: v1(123.317,56.515) Q1.4 ; v1(123.317,66.294) 123.454,66.294 123.619,66.459 IC1.1
  Bottom Layer w0.254: v1(123.317,56.515) v1(123.317,66.294)
NetIC1_3: IC1.3 R8.1 R9.2 | length 10.3
  Top Layer w0.254: R8.1 120.269,60.141 120.269,64.204 120.418,64.353 121.508,64.353 R9.2@121.539,64.384 ; R9.2@121.539,64.151 121.539,63.919 IC1.3
NetIC1_6: IC1.6 IC1.7 R7.1 | length 4.4
  Top Layer w0.508: IC1.6 IC1.7 132.952,65.189 133.442,64.7 R7.1
NetJP3_1: JP3.1 U1.12 | length 8.4
  Top Layer w0.254: U1.12 105.41,74.673 105.41,72.797 ccw(c105.664,72.797) 105.562,72.564 108.841,71.118 JP3.1 109.059,70.9 JP3.1@109.013,70.946
NetJP3_2: JP3.2 U1.11 | length 6.9
  Top Layer w0.254: U1.11 104.203,74.673 104.264,72.032 ccw(c104.518,72.038) 104.4,71.812 JP3.2
NetJP3_3: JP3.3 U1.10 | length 6.2
  Top Layer w0.254: U1.10 102.743,71.761 ccw(c102.997,71.761) 102.853,71.552 JP3.3
NetJP3_4: JP3.4 U1.9 | length 5.7
  Top Layer w0.254: U1.9 101.473,70.485 JP3.4
NetL1_1: L1.1 R1.1 | length 4
  Top Layer w0.508: L1.1 118.12,69.469 118.628,69.977 R1.1
NetL2_1: L2.1 R2.1 | length 4
  Top Layer w0.508: L2.1 118.12,78.867 118.698,79.445 R2.1
NetL2_2: L2.2 R4.2 | length 4.1
  Top Layer w0.508: R4.2 117.1,80.961 117.547,81.407 L2.2
NetL3_1: L3.1 R3.1 | length 4
  Top Layer w0.508: L3.1 118.12,74.295 118.628,74.803 R3.1
NetL3_2: L3.2 R5.2 | length 4.1
  Top Layer w0.508: R5.2 117.1,76.389 117.547,76.835 L3.2
NetL4_1: L4.1 R7.2 | length 2.5
  Top Layer w0.508: L4.1 133.509,60.341 133.509,62.767 R7.2
RESET: BT1.2 C2.1 JP1.3 JP2.3 JP6.5 R11.1 U2.29 | length 155.2
  Top Layer w0.254: BT1.2 94.056,90.189 94.329,89.916 98.04,89.916 R11.1 ; v1(95.631,88.773) 97.192,88.773 97.664,89.246 R11.1@98.137,89.719 ; C2.1 114.393,73.366 114.975,73.366 116.332,72.009 v1(116.395,72.009) ; v1(134.874,72.898) v1(134.874,75.501) ; v1(145.161,68.326) 145.186,68.301 U2.29
  Bottom Layer w0.254: v1(95.631,88.773) 95.631,69.11 95.78,68.961 113.347,68.961 116.3,71.914 v1@116.491,71.914 ; v1(116.395,72.009) v1@116.491,71.914 ; v1(134.874,72.898) 134.874,57.785 JP2.3 ; JP1.3 140.589,50.69 141.097,51.198 JP2.3 ; v1(145.161,68.326) 145.161,74.549 144.208,75.501 v1(134.874,75.501) 117.285,75.501 116.476,74.692 116.476,71.928 v1@116.491,71.914 ; JP6.5 167.642,59.184 167.642,54.634 167.237,54.229 143.764,54.229 JP2.3
RXD: JP13.1 R5.1 U1.3 | length 105.6
  Top Layer w0.254: U1.3 107.823,80.58 107.696,80.453 107.696,78.564 107.972,78.289 R5.1 115.627,78.289 v1(115.697,78.359)
  Bottom Layer w0.254: v1(115.697,78.359) 115.697,78.485 117.412,80.2 136.462,80.2 138.176,81.915 173.079,81.915 173.228,81.766 173.228,49.022 JP13.1
SCL: JP4.10 JP5.1 | length 5.2
  Top Layer w0.508: JP5.1 123.571,86.11 JP4.10
SDA: JP4.9 JP5.2 | length 5.2
  Top Layer w0.508: JP5.2 126.111,86.11 JP4.9
TXD: JP13.2 R4.1 U1.2 | length 128.5
  Top Layer w0.254: U1.2 109.093,83.229 109.791,83.927 110.652,83.927 111.061,83.518 111.061,79.27 111.21,79.121 112.754,79.121 112.903,79.27 112.903,82.401 113.052,82.55 113.675,82.55 R4.1 113.989,82.857 v1(116.064,82.857) ; v1(116.078,93.98) 173.079,93.98 173.228,93.831 173.228,51.562 JP13.2
  Bottom Layer w0.254: v1(116.064,82.857) 116.071,82.864 116.071,93.973 v1(116.078,93.98)
USB_N: U1.6 USB1.2 | length 14.3
  Top Layer w0.381: USB1.2 97.762,73.611 98.964,73.611 99.187,73.835 99.187,78.399 99.782,78.994 103.178,78.994 104.331,80.146 104.331,81.046 104.013,81.363 U1.6
USB_P: U1.5 USB1.3 | length 15.4
  Top Layer w0.381: USB1.3 99.392,72.976 99.822,73.406 99.822,78.136 100.045,78.359 103.441,78.359 104.965,79.883 104.965,81.046 105.283,81.363 U1.5
VBUS: F1.2 Q1.5 Q1.6 Q1.7 Q1.8 | length 39.4
  Top Layer w0.254: F1.2 107.823,66.853 110.49,64.186 v1(110.49,58.674) ; v1(125.857,53.975) 129.391,53.975 129.54,54.124 129.54,56.3 129.755,56.515 Q1.5 ; Q1.8 Q1.8@130.164,60.414
  Top Layer w1.016: Q1.5 Q1.6 Q1.7 Q1.8
  Bottom Layer w0.254: v1(110.49,58.674) 110.49,55.267 111.782,53.975 v1(125.857,53.975)
VIN: AMS1.3 C9.1 D1.2 JP1.8 JP2.8 R8.2 | length 58
  Top Layer w0.254: AMS1.3 103.137,57.017 103.892,57.017 104.648,56.261 v1(111.506,56.261) 111.506,49.183 111.23,48.907 110.324,48.907 109.601,48.184 D1.2 ; C9.1 115.57,45.884 117.258,44.196 127.74,44.196 127.889,44.345 127.889,50.69 128.397,51.198 JP2.8 ; v1(119.507,56.388) 119.604,56.485 119.784,56.485 120.966,57.668 120.966,57.768 121.439,58.241 R8.2
  Top Layer w1.016: D1.2 115.078,47.784 115.57,47.292 C9.1
  Bottom Layer w0.254: v1(111.506,56.261) 119.38,56.261 v1(119.507,56.388)
XTAL_1: C7.1 R10.1 U2.7 Y2.1 | length 23.8
  Top Layer w0.508: U2.7 153.826,73 153.826,66.973 154.124,66.675 157.929,66.675 Y2.1 C7.1@163.195,66.489 ; R10.1 C7.1@163.195,66.489 ; C7.1 163.195,66.102 C7.1@163.195,66.489
XTAL_2: C5.1 R10.2 U2.8 Y2.2 | length 19.4
  Top Layer w0.508: U2.8 158.115,73.787 Y2.2 163.266,74.989 C5.1 163.195,74.738 R10.2
pads on no net: JP1.1 JP2.1 U1.14 U1.15 U2.19 U2.22 USB1.4 Y1.0 Y2.0

## Keep-outs
Keep-Out Layer:
  lines w0.254: 91.44,43.561 91.44,45.466 91.44,92.71 91.44,95.009 91.648,95.123 174.244,95.123 174.244,94.015 174.244,44.314 174.244,43.561 172.593,43.561 94.361,43.561 91.44,43.561

## Text inside footprints (layer, text, board x,y; h text height)
U1: Top Overlay "1" at 110.716,83.2 h1.27 r270; Top Overlay "8" at 99.763,83.161 h1.27 r270; Top Overlay "9" at 99.886,75.267 h1.27 r270; Top Overlay "16" at 110.85,76.059 h1.27 r270